# Altium PCB Booster_Channel_RF_HL.PcbDoc (part 1 of 3)
Units mm, origin at the board's own origin, x right, y up, seen from the top; angles counter-clockwise.
Board outline 159 x 28.5 mm, 2 copper layers (Top Layer, Bottom Layer), stack 1.063 mm thick; 161 components, 99 nets, 420 pads, 478 vias.
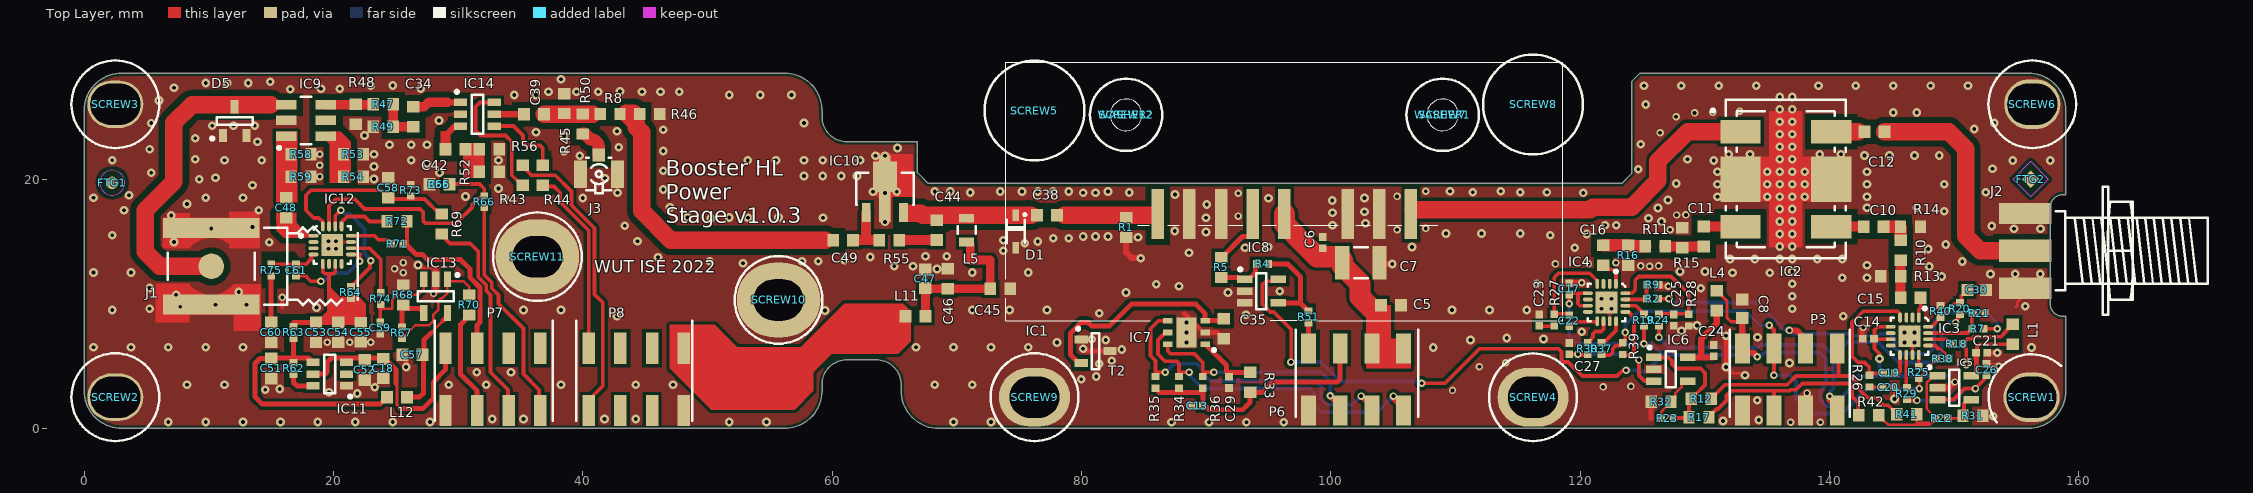
[diagram p0: Top Layer view]
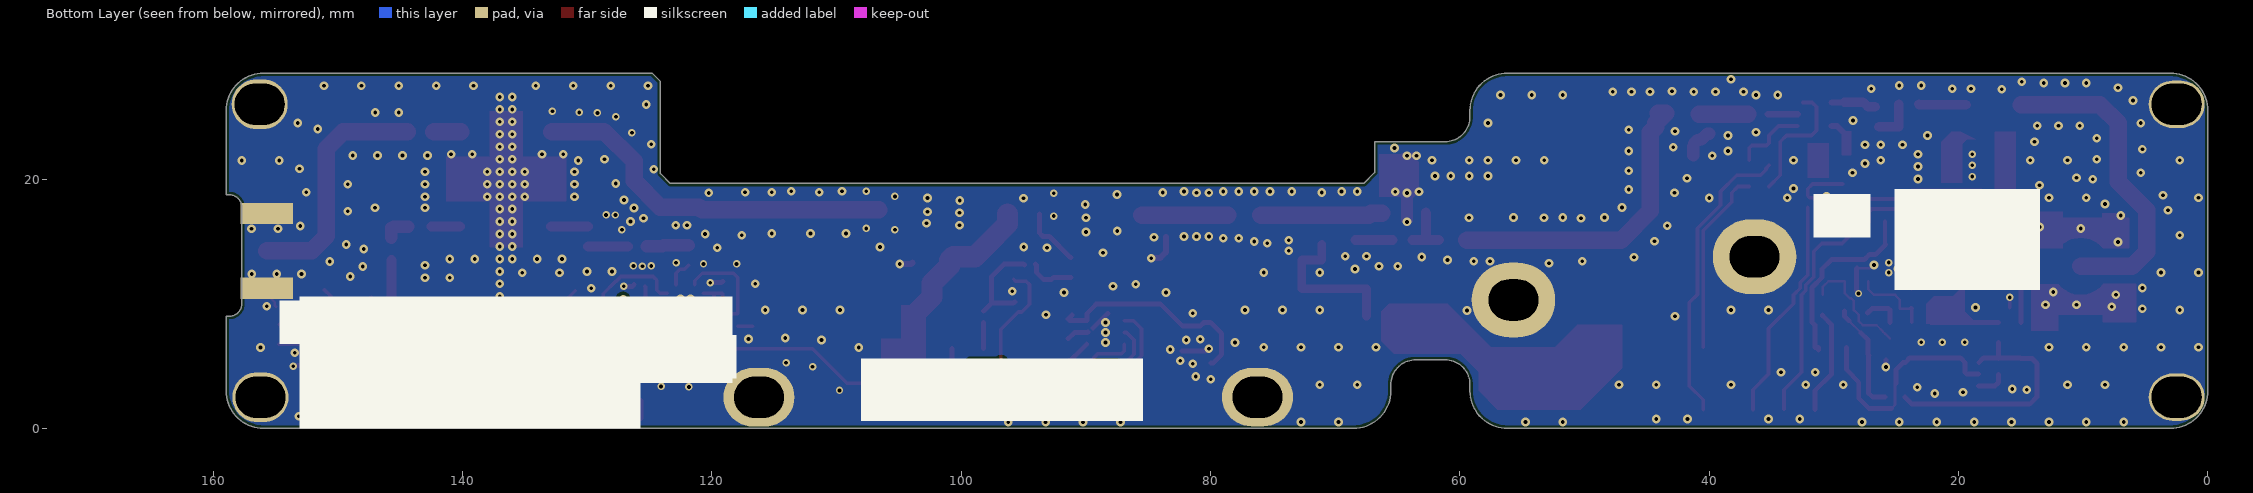
[diagram p1: Bottom Layer view, seen from below]
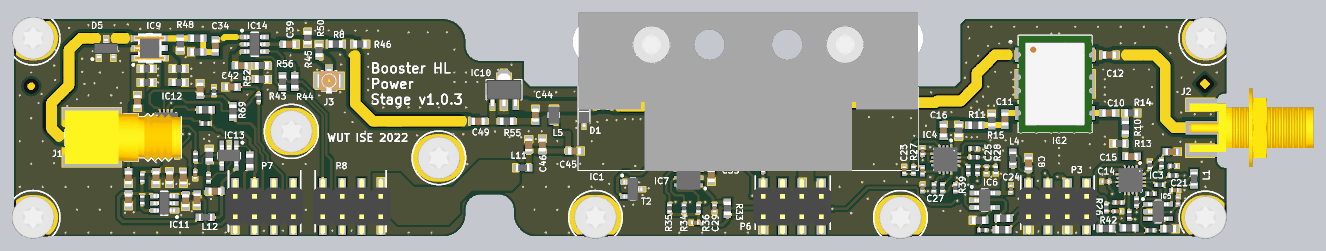
[diagram p3: 3D render of the assembled board from above, using the file's embedded part models]

## Layer stack, top to bottom
Top Layer: signal copper 0.036
Dielectric 1: core 0.9906, Core-042, Dk 4.6
Bottom Layer: signal copper 0.036

## Board outline
2.978,0 56.178,0 ccw(c56.178,3) 59.178,3 59.178,3.5 cw(c61.178,3.5) 61.178,5.5 63.528,5.5 cw(c63.528,3.5) 65.528,3.5 65.528,3 ccw(c68.528,3) 68.528,0 155.978,0 ccw(c155.978,3) 158.978,3 158.978,8.99 158.728,8.99 cw(c158.728,9.99) 157.728,9.99 157.728,17.74 cw(c158.728,17.74) 158.728,18.74 158.978,18.74 158.978,25.5 ccw(c155.978,25.5) 155.978,28.5 124.808,28.5 124.128,27.82 124.128,20.436 123.342,19.65 67.698,19.65 66.828,20.52 66.828,23 61.178,23 cw(c61.178,25) 59.178,25 59.178,25.5 ccw(c56.178,25.5) 56.178,28.5 2.978,28.5 ccw(c2.978,25.5) -0.022,25.5 -0.022,3 ccw(c2.978,3)

## Design rules (kind name [scope] priority, off if disabled: settings)
AcuteAngle [All] p1: minimum=6.00000000000000E+0001 checktracksonly=FALSE
BoardOutlineClearance [All] p1: gap=0.25 ignorepadtopadclearanceinfootprint=FALSE
Clearance Clearance_50_Ohm [InNetClass('50_Ohm') vs InNet('GND')] p1: gap=0.5 ignorepadtopadclearanceinfootprint=FALSE except(0.152: Arc-SMDPad Track-SMDPad SMDPad-SMDPad)
Clearance [All] p2: gap=0.152 ignorepadtopadclearanceinfootprint=FALSE except(0.279: Arc-Poly Track-Poly SMDPad-Poly THPad-Poly Via-Poly Fill-Fill Fill-Poly Fill-Region Fill-Text Fill-Hole Poly-Poly Poly-Region Poly-Text Poly-Hole Region-Region Region-Text Region-Hole)
ComponentClearance [All] p1: gap=0.1 collisioncheckmode=3 verticalgap=0.254 showdistances=FALSE
HoleSize [All] p1: absolutevalues=TRUE maxlimit=5.08 minlimit=0.127 maxpercent=80.000 minpercent=20.000
MinimumAnnularRing [All] p1: minimumring=0.1
MinimumSolderMaskSliver [All] p1: minsoldermaskwidth=0.1
PolygonConnect [All] p1: connectstyle=Direct reliefconductorwidth=0.254 reliefentries=4 polygonreliefangle="90 Angle" airgapwidth=0.254
RoomDefinition U_Booster_PA_OUT_HL [InComponentClass('U_Booster_PA_OUT_HL')] p1 off: confinementstyle=ConfineIn formatcopy=TRUE lockcomponents=FALSE outline 160.077,12.22 173.777,12.22 173.777,18.42 160.077,18.42
RoomDefinition Booster_Channel_RF_HL [InComponentClass('Booster_Channel_RF_HL')] p2 off: confinementstyle=ConfineIn formatcopy=TRUE lockcomponents=FALSE outline 160.077,1.52 181.277,1.52 181.277,12.62 160.077,12.62
RoomDefinition U_Booster_PA_PREAMP_HL [InComponentClass('U_Booster_PA_PREAMP_HL')] p3 off: confinementstyle=ConfineIn formatcopy=TRUE lockcomponents=FALSE outline 54.218,28.02 -2.757,28.02 -2.757,1.92 54.218,1.92
RoutingVias [All] p1: holewidth=0.711 width=1.27 viastyle="Through Hole" minholewidth=0.2 minwidth=0.4 maxholewidth=0.711 maxwidth=1.27
SilkToSilkClearance [All] p1: silktosilkclearance=0.2
SilkToSolderMaskClearance [IsPad] p1: minsilkscreentomaskgap=0.05 clearancetoexposedcopper=TRUE
SolderMaskExpansion [All] p1: expansion=0.1 istentingtop=FALSE
Width Width_50_Ohm [InNetClass('50_Ohm')] p1: maxlimit=1.4 minlimit=0.3 preferedwidth=1.4 bottomlayer_minwidth=1.4 impedanceprofiledriven=TRUE impedanceprofileid={EA730BA9-25A8-47F3-BE28-40912CDC90F2} impedanceprofilevalue=50.000000 minimp=50.000000 maximp=50.000000 favimp=50.000000
Width [All] p2: maxlimit=2 minlimit=0.2 preferedwidth=0.5 minimp=50.000000 maximp=50.000000 favimp=50.000000
25 further rules are at their usual default settings.

## Classes and differential pairs
component class Booster_Channel_RF_HL: FTG1 FTG2 SCREW1 SCREW2 SCREW3 SCREW4 SCREW5 SCREW6 SCREW7 SCREW8 SCREW9 SCREW10 SCREW11 SCREW12 WASHER1 WASHER2
component class U_Booster_PA_OUT_HL: C5 C6 C7 C8 C10 C11 C12 C13 C14 C15 C16 C17 C19 C20 C21 C22 C23 C24 C25 C26 C27 C29 C30 C35 C38 IC1 IC2 IC3 IC4 IC5 IC6 IC7 IC8 J2 L1 L4 P3 P6 R1 R2 R4 R5 R7 R9 R10 R11 R12 R13 R14 R15 R16 R17 R18 R19 R20 R21 R22 R23 R24 R25 R26 R27 R28 R29 R30 R31 R32 R33 R34 R35 R36 R37 R38 R39 R40 R41 R42 R51 T2
component class U_Booster_PA_PREAMP_HL: C18 C34 C39 C42 C44 C45 C46 C47 C48 C49 C51 C52 C53 C54 C55 C56 C57 C58 C59 C60 C61 D1 D5 IC9 IC10 IC11 IC12 IC13 IC14 J1 J3 L5 L11 L12 P7 P8 R8 R43 R44 R45 R46 R47 R48 R49 R50 R52 R53 R54 R55 R56 R58 R59 R62 R63 R64 R65 R66 R67 R68 R69 R70 R71 R72 R73 R74 R75
net class 50_Ohm: NetC10_1 NetC10_2 NetC11_1 NetC11_2 NetC12_1 NetC12_2 NetC15_2 NetC16_2 NetC34_1 NetC34_2 NetC38_1 NetC38_2 NetC39_1 NetC39_2 NetC42_1 NetC42_2 NetC48_1 NetC49_1 NetD5_3 NetIC9_4 NetIC9_6 NetJ3_1

## Components (designator, comment, footprint, x,y, rotation, side; value= is the part's Value field where it differs from the comment)
C5 "680pF" CAPC1608X87N 104.828,9.877 r180 top
C6 "100nF" CAPC1005X55N 99.364,14.906 r270 top
C7 "4.7uF" CAPC3225X270N 102.415,13.29 r180 top
C8 "4.7uF" CAPC1709X95N 133.028,9.59 r270 top
C10 "2.2nF" CAPC1608X87N 143.561,16.18 r180 top
C11 "2.2nF" CAPC1608X87N 129.928,15.39 r90 top
C12 "2.2nF" CAPC1608X87N 143.628,23.79 r180 top
C13 "100nF" CAPC1005X55N 89.276,1.803 r0 top
C14 "100nF" CAPC1005X55N 143.128,7.19 r0 top
C15 "2.2nF" CAPC1608X87N 146.528,10.49 r180 top
C16 "2.2nF" CAPC1608X87N 121.878,13.89 r90 top
C17 "100nF" CAPC1005X55N 119.128,11.19 r270 top
C18 "4.7uF" CAPC1709X95N 23.978,4.8 r90 top
C19 "1nF" CAPC1005X55N 144.828,4.44 r180 top
C20 "100nF" CAPC1005X55N 144.728,3.29 r0 top
C21 "100nF" CAPC1005X55N 152.219,6.06 r180 top
C22 "1nF" CAPC1005X55N 119.134,8.63 r90 top
C23 "100nF" CAPC1005X55N 116.728,8.69 r90 top
C24 "100nF" CAPC1005X55N 130.728,6.24 r270 top
C25 "100nF" CAPC1005X55N 127.528,8.69 r90 top
C26 "10nF" CAPC1005X55N 152.617,4.71 r270 top
C27 "10nF" CAPC1005X55N 119.128,6.39 r270 top
C29 "100nF" CAPC1005X55N 91.828,3.69 r90 top
C30 "Undefined" CAPC1608X90N 151.828,11.1 r180 top
C34 "680pF" CAPC1608X87N 26.378,25 r90 top
C35 "2.2nF" CAPC1608X87N 91.428,7.99 r90 top
C38 "3.3nF" CAPC1608X87N 77.228,17.085 r180 top
C39 "680pF" CAPC1608X87N 36.078,25.2 r0 top
C42 "680pF" CAPC1608X87N 29.778,22.4 r180 top
C44 "2.2nF" CAPC1608X87N 68.378,15.9 r90 top
C45 "680pF" CAPC1608X87N 73.478,11.2 r180 top
C46 "100nF" CAPC1608X87N 69.278,12 r270 top
C47 "4.7uF" CAPC1709X95N 67.478,12 r270 top
C48 "2.2nF" CAPC1608X87N 16.178,17.7 r90 top
C49 "680pF" CAPC1608X87N 60.878,15.1 r0 top
C51 "100nF" CAPC1608X87N 14.978,4.8 r270 top
C52 "100nF" CAPC1608X87N 22.478,4.69 r90 top
C53 "680pF" CAPC1608X87N 18.578,7.7 r90 top
C54 "100nF" CAPC1608X87N 20.378,7.7 r90 top
C55 "4.7uF" CAPC1709X95N 22.178,7.7 r90 top
C56 "47nF" CAPC1608X87N 28.478,19.6 r180 top
C57 "100nF" CAPC1608X87N 26.319,5.919 r0 top
C58 "100nF" CAPC1608X87N 24.378,19.3 r270 top
C59 "10nF" CAPC1005X55N 23.728,8.06 r90 top
C60 "100nF" CAPC1608X87N 14.978,7.7 r270 top
C61 "1nF" CAPC1005X55N 16.978,12.7 r90 top
D1 "AQ4021-01FTG-C" SOD2513X114N 74.728,15.789 r270 top
D5 "SZNUP1301ML3T1G" SOT95P240X110-3N 12.052,24.65 r90 top
FTG1 "Use only in PCB" FIDUCIAL_TOP_C100-200 2.228,19.7 r90 top
FTG2 "Use only in PCB" FIDUCIAL_TOP_S100-200 156.158,19.998 r90 top
IC1 "RFPD3580" SOT-115J_reversed 75.954,23.789 r0 top locked
IC2 "SYDC-20-62HP+" MINI-CIRCUITS_AH202-1 136.51,19.998 r0 top
IC3 "ADL5904ACPZN-R7" QFN50P300X300X80-17N-S175 146.428,7.39 r270 top
IC4 "ADL5904ACPZN-R7" QFN50P300X300X80-17N-S175 122.128,10.09 r270 top
IC5 "MCP6291T-E/OT" SOT95P270X145-5N 150.028,3.26 r0 top
IC6 "MCP6291T-E/OT" SOT95P270X145-5N 127.278,4.74 r0 top
IC7 "MAX6642ATT94+T" SON95P300X300X80-7N-R160X240 88.428,7.69 r180 top
IC8 "MCP6291T-E/OT" SOT95P270X145-5N 94.434,11.007 r0 top
IC9 "TCD-9-1WX+" MINI-CIRCUITS_DB1627 17.778,24.7 r90 top
IC10 "PHA-1+" MINI-CIRCUITS_DF782 64.228,19.229 r0 top
IC11 "ADP3300ARTZ-3.3-RL7" SOT95P280X145-6N 19.678,4.348 r180 top
IC12 "ADL5904ACPZN-R7" QFN50P300X300X80-17N-S175 19.878,14.7 r0 top
IC13 "MCP6291T-E/OT" SOT95P270X145-5N 28.178,10.6 r270 top
IC14 "HMC544AE" SOT95P280X145-6N 31.528,25.2 r0 top
J1 "SMA" LINK_CONSMA002-SMD-G 10.178,13 r0 top
J2 "SMA" MOLEX_73251-2120 155.728,14.24 r180 top
J3 "U.FL" HIROSE_U.FL-R-SMT-1(10) 41.278,20.4 r180 top
L1 "1000R@100MHz" INDC1608X95N 154.732,7.55 r90 top
L4 "1000R@100MHz" INDC1608X95N 130.978,10.24 r90 top
L5 "1.2uH" IND_TDK_ADL2012 70.778,15.9 r90 top
L11 "1000R@100MHz" INDC1608X95N 66.678,9 r180 top
L12 "1000R@100MHz" INDC1608X95N 25.078,2.5 r180 top
P3 "ZL264-8DG" HDR2X4_SMD#1 136.828,3.92 r90 top value=-
P6 "ZL264-8DG" HDR2X4_SMD#1 102.028,3.92 r90 top value=-
P7 "ZL264-8DG" HDR2X4_SMD#2 32.778,3.92 r90 top value="should be fixed with thermal glue"
P8 "ZL264-8DG" HDR2X4_SMD#2 44.278,3.92 r90 top value="should be fixed with thermal glue"
R1 "Undefined" RESC1608X55N 83.574,16.126 r90 top
R2 "0" RESC1005X40N 125.828,10.39 r0 top
R4 "10k" RESC1005X40N 94.528,13.19 r180 top
R5 "Undefined" RESC1608X55N 91.194,12.907 r270 top
R7 "0" RESC1005X40N 151.928,7.99 r0 top
R8 "0" RESC1608X55N 42.178,25.219 r0 top
R9 "0" RESC1005X40N 125.839,11.52 r180 top
R10 "71R5" RESC1608X55N 145.728,14.29 r90 top
R11 "71R5" RESC1608X55N 126.028,14.59 r180 top
R12 "Undefined" RESC1608X55N 129.728,2.38 r0 top
R13 "46R4" RESC1608X55N 144.928,12.19 r0 top
R14 "96R5" RESC1608X55N 146.51,16.19 r180 top
R15 "96R5" RESC1608X55N 128.188,15.29 r270 top
R16 "46R4" RESC1608X55N 123.878,13.89 r90 top
R17 "100" RESC1608X55N 129.55,0.888 r0 top
R18 "10k" RESC1005X40N 150.228,6.79 r180 top
R19 "10k" RESC1005X40N 125.128,8.69 r270 top
R20 "0" RESC1005X40N 150.478,9.609 r90 top
R21 "0" RESC1005X40N 152.022,9.24 r180 top
R22 "10k" RESC1005X40N 149.028,0.79 r0 top
R23 "10k" RESC1005X40N 126.994,0.822 r180 top
R24 "0" RESC1005X40N 126.328,8.69 r90 top
R25 "0" RESC1005X40N 147.178,4.48 r90 top
R26 "3R9" RESC1005X40N 143.228,3.79 r270 top
R27 "3R9" RESC1005X40N 117.928,8.69 r270 top
R28 "10k" RESC1005X40N 128.728,8.69 r270 top
R29 "0" RESC1005X40N 146.228,2.79 r90 top
R30 "0" RESC1005X40N 120.628,6.39 r90 top
R31 "20k" RESC1608X55N 151.519,0.991 r180 top
R32 "20k" RESC1608X55N 126.508,2.128 r0 top
R33 "39" RESC1608X55N 93.528,3.69 r270 top
R34 "10k" RESC1005X40N 87.828,3.69 r90 top
R35 "10k" RESC1005X40N 85.928,3.69 r90 top
R36 "10k" RESC1005X40N 89.728,3.69 r90 top
R37 "0" RESC1005X40N 121.728,6.39 r90 top
R38 "0" RESC1005X40N 149.107,5.6 r0 top
R39 "0" RESC1005X40N 123.428,6.39 r270 top
R40 "0" RESC1005X40N 148.928,9.39 r90 top
R41 "100" RESC1608X55N 146.211,1.118 r0 top
R42 "Undefined" RESC1608X55N 143.163,1.042 r0 top
R43 "100" RESC1608X55N 35.178,20.3 r90 top
R44 "100" RESC1608X55N 36.778,20.3 r270 top
R45 "Undefined" RESC1608X55N 38.478,26.05 r270 top
R46 "Undefined" RESC1608X55N 45.353,25.219 r180 top
R47 "0" RESC1608X55N 23.978,26 r0 top
R48 "Undefined" RESC1608X55N 21.778,25.2 r270 top
R49 "Undefined" RESC1608X55N 23.978,24.2 r180 top
R50 "Undefined" RESC1608X55N 39.978,24.419 r90 top
R51 "10k" RESC1005X40N 98.218,8.948 r90 top
R52 "100" RESC1608X55N 32.478,20.6 r180 top
R53 "100" RESC1608X55N 21.578,22 r180 top
R54 "100" RESC1608X55N 21.578,20.2 r180 top
R55 "1k" RESC1608X55N 64.578,15.1 r0 top
R56 "100" RESC1608X55N 32.478,22.4 r0 top
R58 "169" RESC1608X55N 17.378,22 r180 top
R59 "169" RESC1608X55N 17.378,20.2 r180 top
R62 "10k" RESC1005X40N 16.778,4.8 r90 top
R63 "0" RESC1005X40N 16.778,7.7 r90 top
R64 "10k" RESC1005X40N 21.378,10.9 r90 top
R65 "0" RESC1608X55N 28.478,19.6 r180 top
R66 "0" RESC1005X40N 32.078,18.18 r90 top
R67 "10k" RESC1005X40N 25.478,7.666 r90 top
R68 "20k" RESC1608X55N 25.578,10.7 r270 top
R69 "0" RESC1608X55N 28.678,16.4 r270 top
R70 "100" RESC1608X55N 30.878,9.9 r270 top
R71 "0" RESC1005X40N 25.078,14.8 r180 top
R72 "Undefined" RESC1608X55N 25.078,16.6 r0 top
R73 "10k" RESC1005X40N 26.185,19.1 r90 top
R74 "0" RESC1005X40N 23.778,10.4 r90 top
R75 "0" RESC1005X40N 14.978,12.7 r90 top
SCREW1 "M3x6" BOSSARD_BN5687-3061605_v 156.228,2.49 r0 top locked
SCREW2 "M3x6" BOSSARD_BN5687-3061605_v 2.478,2.5 r0 top locked
SCREW3 "M3x6" BOSSARD_BN5687-3061605_v 2.478,26 r0 top locked
SCREW4 "M3x6" BOSSARD_BN5687-3061605_v 116.228,2.49 r0 top locked
SCREW5 "M3x12" BOSSARD_B3X12/BN4851_v 76.225,25.5 r0 top
SCREW6 "M3x6" BOSSARD_BN5687-3061605_v 156.288,26 r0 top locked
SCREW7 "M2.5x16" BOSSARD_BN5687-3061603_v 108.974,25.149 r90 top
SCREW8 "M3x12" BOSSARD_B3X12/BN4851_v 116.225,25.986 r0 top
SCREW9 "M3x6" BOSSARD_BN5687-3061605_v 76.228,2.5 r0 top locked
SCREW10 "M3x6" BOSSARD_BN5687-3061605_v 55.688,10.3 r0 top locked
SCREW11 "M3x6" BOSSARD_BN5687-3061605_v 36.348,13.77 r0 top locked
SCREW12 "M2.5x16" BOSSARD_BN5687-3061603_v 83.574,25.149 r90 top
T2 "MMBT3906LT1G" SOT95P240X110-3N 81.128,6.19 r0 top
WASHER1 "D5xd2.7" BOSSARD_BN678-8303525_v 108.974,25.149 r90 top
WASHER2 "D5xd2.7" BOSSARD_BN678-8303525_v 83.574,25.149 r90 top

## Footprints (in the part's own frame and the unit in brackets; to place one, negate y for a bottom-side part, rotate by r counter-clockwise, add the part's x,y. Pads: shape width x height; smd on the part's side, far side on the other; paste and mask are expansions set on the pad)
BOSSARD_B3X12/BN4851_v [mm] "M3 L=12mm Hexalobular Countersank Head Screw, Fully Threaded - Stainless Steel A2"
  silkscreen extent -4,-4 4,4, body extent -3,-3 3,3, height 6.7
BOSSARD_BN678-8303525_v [mm] "Waved Spring Washer for M2.5 Screw - Stainless Steel - A2 / 1.4310"
  silkscreen extent -2.9,-2.9 2.9,2.9, body extent -2.5,-2.5 2.5,2.5, height 15.6
BOSSARD_BN5687-3061603_v [mm] "M2.5 L=16mm Hexalobular Socket Pan Head Screw, Fully Threaded - Stainless Steel A2"
  silkscreen extent -2.9,-2.9 2.9,2.9, body extent -2.5,-2.5 2.5,2.5, height 17.6
BOSSARD_BN5687-3061605_v [mm] "M3 L=6mm Hexalobular Socket Pan Head Screw, Fully Threaded - Stainless Steel A2"
  silkscreen extent -3.45,-2.02 2.36,3.45, body extent -2.8,-2.8 2.8,2.8, height 2.4
CAPC1005X55N [mm] "Capacitor, Non-Polarized, Chip; 1.00mm L X 0.50mm W X 0.70mm H, IPC Medium Density"
  rect 0.62x0.62 smd: 1(-0.45,0) 2(0.45,0)
  body extent -0.52,-0.27 0.53,0.28, height 0.55
CAPC1608X87N [mm] "Chip Capacitor, Body 1.6x0.8mm IPC Medium Density"
  rect 0.95x1 smd: 1(-0.8,0) 2(0.8,0)
  body extent -0.87,-0.47 0.88,0.48, height 0.87
CAPC1608X90N [mm] "Chip Capacitor, Body 1.6x0.8mm IPC Medium Density"
  rect 0.95x0.95 smd: 1(-0.75,0) 2(0.75,0)
  body extent -0.85,-0.45 0.85,0.45, height 0.9
CAPC1709X95N [mm] "Capacitor, non-Polarized, Chip; 1.65mm L X 0.85mm W X 0.95mm H,IPC Medium Density"
  rect 0.95x1 smd: 1(-0.75,0) 2(0.75,0)
  body extent -0.87,-0.47 0.88,0.48, height 0.95
CAPC3225X270N [mm] "Chip Capacitor, Body 3.2x2.5mm, IPC Medium Density"
  rect 1.15x2.7 smd: 1(-1.5,0) 2(1.5,0)
  silkscreen extent -0.55,-1.25 0.55,1.25, body extent -1.7,-1.35 1.7,1.35, height 2.7
FIDUCIAL_TOP_C100-200 [mm] "Round Fiducial Target, Top Layer, 1.0mm, Top Solder 2.0mm, Keepout =2.0mm"
  round 1 smd paste-0.51 mask+0.5: FTG2(0,0)
  Top Layer keep-out circle w0.1: c0,0 r1
FIDUCIAL_TOP_S100-200 [mm] "Square Fiducial Target, Top Layer, 1.0mm, Top Solder 2.0mm, Keepout =2.0mm"
  rect 1x1 smd rot 45 paste-0.51 mask+0.5: 1(0,0)
  Top Layer keep-out region: 1.414,0 0,-1.414 -1.414,0 0,1.414
HDR2X4_SMD#1 [mm]
  rect 2.4x1.2 smd: 1(-2.5,-3.81) 2(2.5,-3.81) 3(-2.5,-1.27) 4(2.5,-1.27) 5(-2.5,1.27) 6(2.5,1.27) 7(-2.5,3.81) 8(2.5,3.81)
  silkscreen extent -3,-4.79 4,4.83, body extent -3.65,-5.08 3.65,5.08, height 9.3
HDR2X4_SMD#2 [mm]
  rect 2.5x1 smd: 1(-2.5,-3.81) 2(2.5,-3.81) 3(-2.5,-1.27) 4(2.5,-1.27) 5(-2.5,1.27) 6(2.5,1.27) 7(-2.5,3.81) 8(2.5,3.81)
  silkscreen extent -3.3,-4.79 4.7,4.68, body extent -3.65,-5.08 3.65,5.08, height 9.3
HIROSE_U.FL-R-SMT-1(10) [mm] "Up to 6GHz Ultra Small Surface Mount Male Coaxial Connectors U.FL Series"
  rect 1x1.05 smd: 1(0,-1.525)
  rect 1.05x2.2 smd: 2(-1.475,0) 2(1.475,0)
  silkscreen extent -1,-1.3 1,1.55, body extent -1.5,-1.55 1.5,1.55, height 1.25
IND_TDK_ADL2012 [mm] "Chip Inductor, EIA 0805, Metric 2012, Body 2.0x1.25mm"
  rect 0.7x1.2 smd: 1(-0.95,0) 2(0.95,0)
  silkscreen extent -0.3,-0.72 0.3,0.72, body extent -1.1,-0.72 1.1,0.73, height 1.4
INDC1608X95N [mm] "Chip Inductor, 2-Leads, EIA 0603, Metric 1608, Body 1.6x0.8mm, IPC Medium Density"
  rect 0.95x1 smd: 1(-0.8,0) 2(0.8,0)
  body extent -0.87,-0.47 0.88,0.48, height 0.95
LINK_CONSMA002-SMD-G [mm] "SSMA Female Right Angled - Surface Mount"
  round 2.05 smd: 1(0,0)
  rect 7.76x1.6 smd: 2(0,-3.08) 2(0,3.08)
  Top Layer region: -3.88,1.44 -3.88,3.88 3.88,3.88 3.88,1.44 1.768,1.44 0.979,2.059 0,2.28 -0.979,2.059 -1.768,1.44 -1.768,1.44
  Top Layer region: 3.88,-1.44 3.88,-3.88 -3.88,-3.88 -3.88,-1.44 -1.768,-1.44 -0.979,-2.059 0,-2.28 0.979,-2.059 1.768,-1.44 1.768,-1.44
  silkscreen extent -3.5,-3.12 11.75,3.19, body extent -3.5,-3.5 11.7,3.5, height 10.8
MINI-CIRCUITS_AH202-1 [mm] "MINI-CIRCUITS AH202-1 Case, Body 12.7mm L X 9.65mm W X 6.35mm H"
  rect 3.23x1.88 smd: 1(3.643,3.81) 4(3.643,-3.81) 5(-3.643,-3.81) 8(-3.643,3.81)
  rect 3.23x2 smd: 2(3.643,0.83) 3(3.643,-0.83) 6(-3.643,-0.83) 7(-3.643,0.83)
  Top Layer region: -1.335,1.78 -4.825,1.78 -4.825,-1.78 -1.335,-1.78 -1.335,-5.46 1.335,-5.46 1.335,-1.78 4.825,-1.78 4.825,1.78 1.335,1.78 1.335,5.46 -1.335,5.46
  silkscreen extent -5.97,-6.35 4.82,6.35, body extent -4.82,-6.35 4.83,6.35, height 6.35
MINI-CIRCUITS_DB1627 [mm] "MINI-CIRCUITS Case Style DB1627 - Body 4.06X3.81mm"
  rect 0.76x1.65 smd: 1(-1.27,1.59) 2(0,1.59) 3(1.27,1.59) 4(1.27,-1.59) 5(0,-1.59) 6(-1.27,-1.59)
  silkscreen extent -2.32,-0.42 1.91,2.29, body extent -1.9,-2.03 1.91,2.03, height 4.06
MINI-CIRCUITS_DF782 [mm] "MINI-CIRCUITS DF782 Case, 1.50mm pitch; 4 pin, 2.44mm W X 4.49mm L"
  rect 0.71x1.5 smd: 1(-1.5,-1.915) 3(1.5,-1.915)
  rect 0.917x2.41 smd: 2(0,-1.46)
  rect 1.905x2.427 smd: 4(0,0.958)
  rect 0.92x0.493 smd: 4(0,2.418)
  Top Layer region: -0.457,-0.751 -0.953,-0.255 -0.953,2.172 -0.46,2.665 0.46,2.665 0.953,2.172 0.953,-0.255 0.457,-0.751 0.457,-2.665 -0.457,-2.665
  silkscreen extent -2.3,-1.3 2.3,1.3, body extent -2.3,-2.12 2.3,2.12, height 1.6
MOLEX_73251-2120 [mm] "50 Ohm, SMA Edge Mount PCB, With Jam Nut And Lock Washer"
  rect 4.19x1.78 smd: 1(0,0)
  rect 4.19x1.7 smd: 2(0,3) 2(0,-3)
  rect 4.19x1.7 smd far side: 2(0,3) 2(0,-3)
  silkscreen extent -14.64,-5.13 -2.44,5.13, body extent -14.64,-5.13 1.62,5.13, height 5.76
QFN50P300X300X80-17N-S175 [mm] "QFN, 0.50mm Pitch, Square; 16 Pin, 3.00mm L X 3.00mm W X 0.80mm H Body (w/Thermal Tab 1.75 X 1.75mm),  IPC Medium Density"
  oval 0.8x0.3 smd: 1(-1.5,0.75) 2(-1.5,0.25) 3(-1.5,-0.25) 4(-1.5,-0.75) 9(1.5,-0.75) 10(1.5,-0.25) 11(1.5,0.25) 12(1.5,0.75)
  oval 0.3x0.8 smd: 5(-0.75,-1.5) 6(-0.25,-1.5) 7(0.25,-1.5) 8(0.75,-1.5) 13(0.75,1.5) 14(0.25,1.5) 15(-0.25,1.5) 16(-0.75,1.5)
  rect 1.75x1.75 smd: 17(0,0)
  silkscreen extent -2.35,-1.5 1.5,1.5, body extent -1.57,-1.57 1.58,1.58, height 0.8
RESC1005X40N [mm] "Chip Resistor, EIA 0402, Metric 1005, Body 1.0x0.5mm, IPC Medium Density"
  rect 0.58x0.62 smd: 1(-0.47,0) 2(0.47,0)
  body extent -0.52,-0.27 0.53,0.28, height 0.4
RESC1608X55N [mm] "Chip Resistor, EIA 0603, Metric 1608, Body 1.6x0.8mm, IPC Medium Density"
  rect 0.9x1 smd: 1(-0.8,0) 2(0.8,0)
  body extent -0.87,-0.47 0.88,0.48, height 0.55
SOD2513X114N [mm] "SOD-323 Diode; 1.75mm W X 1.30mm L X 1.14mm H Body, IPC Medium Density"
  rect 0.9x0.5 smd: 1(-1.3,0) 2(1.3,0)
  silkscreen extent -1.45,-0.72 0.95,0.82, body extent -1.4,-0.72 1.4,0.73, height 1.15
SON95P300X300X80-7N-R160X240 [mm] "SON, 0.95mm Pitch; 6 Pin, 3.00mm W X 3mm L X 0.80mm H body (w/Thermal Tab 1.6mm x 2.4mm)"
  rect 0.75x0.45 smd: 1(-1.5,0.95) 2(-1.5,0) 3(-1.5,-0.95) 4(1.5,-0.95) 5(1.5,0) 6(1.5,0.95)
  rect 1.6x2.4 smd: 7(0,0)
  silkscreen extent -2.33,1.29 -2.08,1.54, body extent -1.55,-1.55 1.55,1.55, height 0.8
SOT95P240X110-3N [mm] "SOT23 3-Leads, Pitch 0.95mm, Body 1.3x2.9mm, IPC Medium Density"
  rect 1.05x0.65 smd: 1(-1.15,0.95) 2(-1.15,-0.95) 3(1.15,0)
  silkscreen extent -1.52,-1.45 0.3,1.92, body extent -1.25,-1.5 1.25,1.5, height 1.1
SOT95P270X145-5N [mm] "SOT, 0.95mm Pitch; 5 Pin,1.55mm W X 2.90mm L X 1.45mm H body, IPC Medium Density"
  rect 1.25x0.6 smd: 1(-1.35,0.95) 2(-1.35,0) 3(-1.35,-0.95) 4(1.35,-0.95) 5(1.35,0.95)
  silkscreen extent -2.12,-1.45 0.4,1.77, body extent -1.35,-1.45 1.35,1.45, height 1.45
SOT95P280X145-6N [mm] "SOT23, 6-Leads, Body 1.6x3.0mm, Pitch 0.95mm, IPC Medium Density"
  rect 1.05x0.6 smd: 1(-1.35,0.95) 2(-1.35,0) 3(-1.35,-0.95) 4(1.35,-0.95) 5(1.35,0) 6(1.35,0.95)
  silkscreen extent -1.78,-1.55 0.45,1.92, body extent -1.4,-1.5 1.4,1.5, height 1.45
SOT-115J_reversed [mm] "SOT-115J 2.54 Hybrid module"
  rect 1x4 smd: 1(10.16,-6.604) 2(12.7,-6.604) 3(15.24,-6.604) 4(17.78,-6.604) 5(20.32,-6.604) 7(25.4,-6.604) 8(27.94,-6.604) 9(30.48,-6.604)
  silkscreen extent -2.03,-15.14 42.67,5.59, body extent -1.93,-15.24 42.57,5.56, height 17.4

## Part data
C5 C34 C39 C42 C45 C49 C53: library part CC0603_680PF_50V_5%_NP0, "Non-polarised capacitor", Case=0603, Manufacturer=GENERIC, Manufacturer1 ComponentHeight=0.87mm, Manufacturer1 Example=PHYCOMP, Manufacturer1 Part Number=223886715681, Tolerance=±5%, Voltage=50V, Author="CERN DEM JLC", Component Type=Standard, CreateDate=03.12.2007, HelpURL=\\cern.ch\dfs\Applications\Altium\Datasheets\CC0603_NP0_PHYCOMP.pdf, LatestRevisionDate=03.12.2007, Manufacturer Part Number=CC0603_680PF_50V_5%_NP0, Mounted=Yes, Part Description="SMD Multilayer Chip Ceramic Capacitor", Part Number=CC0603_680PF_50V_5%_NP0, Pin Count=2, Sense=No, SMD=Yes, Socket=No, Status=Preferred, TC=C0G/NP0
C6 C13 C14 C17 C20 C21 C23 C24 C25 C29: library part CC0402_100NF_50V_10%_X7R, "Non-polarised capacitor", Case=0402, Manufacturer=GENERIC, Manufacturer1 ComponentHeight=0.55mm, Manufacturer1 Example=MURATA, Manufacturer1 Part Number=GRM155R71H104KE14D, Tolerance=±10%, Voltage=50V, Author="CERN DEM MR", Component Type=Standard, CreateDate=30/06/2017, HelpURL=\\cern.ch\dfs\Applications\Altium\Datasheets\CC0402_MURATA_GRM155R71H104KE14D.pdf, LatestRevisionDate=30/06/2017, Manufacturer Part Number=CC0402_100NF_50V_10%_X7R, Mounted=Yes, Part Description="SMD Multilayer Chip Ceramic Capacitor", Part Number=CC0402_100NF_50V_10%_X7R, Pin Count=2, Sense=No, SMD=Yes, Socket=No, Status=None, TC=X7R
C7: library part CC1210_4.7UF_50V_10%_X7R, "Non-polarised capacitor", Case=1210, Manufacturer=GENERIC, Manufacturer1 ComponentHeight=2.7mm, Manufacturer1 Example=KEMET, Manufacturer1 Part Number=C1210C475K5RAC, Tolerance=±10%, Voltage=50V, Author="CERN DEM JLC", Component Type=Standard, CreateDate=01.04.2009, HelpURL=\\cern.ch\dfs\Applications\Altium\Datasheets\CC1210_X7R_KEMET.pdf, LatestRevisionDate=05.05.2009, Manufacturer Part Number=CC1210_4.7UF_50V_10%_X7R, Mounted=Yes, Part Description="SMD Multilayer Chip Ceramic Capacitor", Part Number=CC1210_4.7UF_50V_10%_X7R, Pin Count=2, Sense=No, SMD=Yes, Socket=No, Status=None, TC=X7R
C8 C18 C47 C55: library part CC0603_4.7UF_16V_10%_X5R, "Non-polarised capacitor", Case=0603, Manufacturer=GENERIC, Manufacturer1 ComponentHeight=0.95mm, Manufacturer1 Example="TAIYO YUDEN", Manufacturer1 Part Number=EMK107ABJ475KA-T, Tolerance=±10%, Voltage=16V, Author="CERN DEM JLC", Component Type=Standard, CreateDate=16.12.2013, HelpURL=\\cern.ch\dfs\Applications\Altium\Datasheets\CC0603_X7R_TAIYO-YUDEN_HIGH-VALUE.pdf, LatestRevisionDate=16.09.2014, Manufacturer Part Number=CC0603_4.7UF_16V_10%_X5R, Mounted=Yes, Part Description="SMD Multilayer Chip Ceramic Capacitor", Part Number=CC0603_4.7UF_16V_10%_X5R, Pin Count=2, Sense=No, SMD=Yes, Socket=No, Status=None, TC=X5R
C10 C11 C12 C15 C16 C35 C44 C48: library part CC0603_2.2NF_50V_5%_C0G, "Non-polarised capacitor", Case=0603, Manufacturer=GENERIC, Manufacturer1 ComponentHeight=0.9mm, Manufacturer1 Example=TDK, Manufacturer1 Part Number=C1608C0G1H222J080AA, Tolerance=±5%, Voltage=50V, Author="CERN DEM JMW", Component Type=Standard, CreateDate=23.06.2014, HelpURL=\\cern.ch\dfs\Applications\Altium\Datasheets\CC0603_C0G_TDK_C.pdf, LatestRevisionDate=23.06.2014, Manufacturer Part Number=CC0603_2.2NF_50V_5%_C0G, Mounted=Yes, Part Description="SMD Multilayer Chip Ceramic Capacitor", Part Number=CC0603_2.2NF_50V_5%_C0G, Pin Count=2, Sense=No, SMD=Yes, Socket=No, Status=Preferred, TC=C0G/NP0
C19 C22 C61: library part CC0402_1NF_50V_10%_X7R, "Non-polarised capacitor", Case=0402, Manufacturer=GENERIC, Manufacturer1 ComponentHeight=0.55mm, Manufacturer1 Example=PHYCOMP, Manufacturer1 Part Number=223858715623, Tolerance=±10%, Voltage=50V, Author="CERN DEM JLC", Component Type=Standard, CreateDate=03.12.2007, HelpURL=\\cern.ch\dfs\Applications\Altium\Datasheets\CC0402_X7R_PHYCOMP.pdf, LatestRevisionDate=03.12.2007, Manufacturer Part Number=CC0402_1NF_50V_10%_X7R, Mounted=Yes, Part Description="SMD Multilayer Chip Ceramic Capacitor", Part Number=CC0402_1NF_50V_10%_X7R, Pin Count=2, Sense=No, SMD=Yes, Socket=No, Status="Not Recommended", TC=X7R
C26 C27 C59: library part CC0402_10NF_25V_10%_X7R, "Non-polarised capacitor", Case=0402, Manufacturer=GENERIC, Manufacturer1 ComponentHeight=0.55mm, Manufacturer1 Example=TDK, Manufacturer1 Part Number=C1005X7R1E103KT, Tolerance=±10%, Voltage=25V, Author="CERN DEM JLC", Component Type=Standard, CreateDate=25.10.2012, HelpURL=\\cern.ch\dfs\Applications\Altium\Datasheets\CC0402_X7R_TDK_C.pdf, LatestRevisionDate=25.10.2012, Manufacturer Part Number=CC0402_10NF_25V_10%_X7R, Mounted=Yes, Part Description="SMD Multilayer Chip Ceramic Capacitor", Part Number=CC0402_10NF_25V_10%_X7R, Pin Count=2, Sense=No, SMD=Yes, Socket=No, Status=Preferred, TC=X7R
C30: library part CC0603_NO-VALUE, "Non-polarised capacitor", Case=0603, Manufacturer1 ComponentHeight=0.9mm, Author="CERN DEM MR", Component Type=Standard, CreateDate=22.11.2016, HelpURL=Undefined, LatestRevisionDate=22.11.2016, Manufacturer=Undefined, Manufacturer Part Number=CC0603_NO-VALUE, Mounted=No, Part Description="Reserved Footprint For 0603(1608) Chip Ceramic Capacitor", Part Number=CC0603_NO-VALUE, Pin Count=2, Sense=No, SMD=Yes, Socket=No, Status=None
C38: library part CC0603_3.3NF_50V_5%_C0G, "Non-polarised capacitor", Case=0603, Manufacturer=GENERIC, Manufacturer1 ComponentHeight=0.9mm, Manufacturer1 Example=TDK, Manufacturer1 Part Number=C1608C0G1H332J080AA, Tolerance=±5%, Voltage=50V, Author="CERN DEM MR", Component Type=Standard, CreateDate=02.11.2016, HelpURL=\\cern.ch\dfs\Applications\Altium\Datasheets\CC0603_C0G_TDK_C.pdf, LatestRevisionDate=02.11.2016, Manufacturer Part Number=CC0603_3.3NF_50V_5%_C0G, Mounted=Yes, Part Description="SMD Multilayer Chip Ceramic Capacitor", Part Number=CC0603_3.3NF_50V_5%_C0G, Pin Count=2, Sense=No, SMD=Yes, Socket=No, Status=Preferred, TC=C0G/NP0
C46 C51 C52 C54 C57 C58 C60: library part CC0603_100NF_50V_10%_X7R, "Non-polarised capacitor", Case=0603, Manufacturer=GENERIC, Manufacturer1 ComponentHeight=0.87mm, Manufacturer1 Example=PHYCOMP, Manufacturer1 Part Number=223858615649, Tolerance=±10%, Voltage=50V, Author="CERN DEM JLC", Component Type=Standard, CreateDate=03.12.2007, HelpURL=\\cern.ch\dfs\Applications\Altium\Datasheets\CC0603_X7R_PHYCOMP.pdf, LatestRevisionDate=03.12.2007, Manufacturer Part Number=CC0603_100NF_50V_10%_X7R, Mounted=Yes, Part Description="SMD Multilayer Chip Ceramic Capacitor", Part Number=CC0603_100NF_50V_10%_X7R, Pin Count=2, Sense=No, SMD=Yes, Socket=No, Status=Preferred, TC=X7R
C56: library part CC0603_47NF_25V_10%_X7R, "Non-polarised capacitor", Case=0603, Manufacturer=GENERIC, Manufacturer1 ComponentHeight=0.87mm, Manufacturer1 Example=PHYCOMP, Manufacturer1 Part Number=223891615645, Tolerance=±10%, Voltage=25V, Author="CERN DEM JLC", Component Type=Standard, CreateDate=03/12/2007, HelpURL=\\cern.ch\dfs\Applications\Altium\Datasheets\CC0603_X7R_PHYCOMP.pdf, LatestRevisionDate=03/12/2007, Manufacturer Part Number=CC0603_47NF_25V_10%_X7R, Mounted=Yes, Part Description="SMD Multilayer Chip Ceramic Capacitor", Part Number=CC0603_47NF_25V_10%_X7R, Pin Count=2, Sense=No, SMD=Yes, Socket=No, Status=Preferred, TC=X7R
D1: library part D_TVS_AQ4021-01FTG-C, "6V Bi-directional,ESD Protection for Transient Voltage Suppressor Diode", Case=SOD323, Manufacturer=Littlefuse, Power=450W, Voltage=6V, Author=GK, Bonding=No, Component Type=Standard, ComponentHeight=1.14mm, CreateDate=22.07.2015, Device=AQ4021-01FTG-C, HelpURL=\\cern.ch\dfs\Applications\Altium\Datasheets\CDSOD323-T12C-DSL.pdf, LatestRevisionDate=19.12.2017, Manufacturer Part Number=AQ4021-01FTG-C, Mounted=Yes, PackageDescription="SOD-323 Diode; 1.75mm W X 1.30mm L X 1.14mm H Body, IPC Medium Density", Part Description="Bi-directional ESD Protection for Transient Voltage Suppressor Diode", Part Number=AQ4021-01FTG-C, Pin Count=2, PressFit=No, Sense=No, SMD=Yes, Socket=No
D5: library part D_TVS_SZNUP1301ML3T1G, "Low Capacitance Diode Array for ESD Protection in a Single Data Line", Case=SOT23, Manufacturer=ONSEMI, Power=215mA, Voltage=70V, Author=GK, Bonding=No, Component Type=Standard, ComponentHeight=1.1mm, CreateDate=18.01.2010, Device=SZNUP1301ML3T1G, HelpURL=\\cern.ch\dfs\Applications\Altium\Datasheets\BAR66.pdf, LatestRevisionDate=05.10.2010, Manufacturer Part Number=SZNUP1301ML3T1G, Mounted=Yes, PackageDescription="SOT23 3-Leads, Pitch 0.95mm - Body 1.3x2.9mm, IPC Medium Density", Part Description="Low Capacitance Diode Array for ESD Protection in a Single Data Line", Part Number=SZNUP1301ML3T1G, Pin Count=3, PressFit=No, Sense=No, SMD=Yes, Socket=No
FTG1: library part FIDUCIAL_TARGET_C100-200, "Fiducial Target", Author="CERN DEM JLC", Component Type="Standard (No BOM)", ComponentHeight=0mm, CreateDate=09.02.2010, Family=Fiducial, HelpURL=Undefined, LatestRevisionDate=04.04.2012, Mounted=No, PackageDescription="Round Fiducial Target, Top Layer, 1.0mm, Top Solder 2.0mm, Keepout =2.0mm", Part Description="Round Fiducial Target, Top Layer, 1.0mm, Top Solder 2.0mm, Keepout =2.0mm", Part Number=FIDUCIAL_TARGET_C100-200, Pin Count=1, Sense=No, SMD=Yes, Socket=No, Status=None
FTG2: library part FIDUCIAL_TARGET_S100-200, "Fiducial Target", Author="CERN DEM JLC", Component Type="Standard (No BOM)", ComponentHeight=0mm, CreateDate=09.02.2010, Family=Fiducial, HelpURL=Undefined, LatestRevisionDate=04.04.2012, Mounted=No, PackageDescription="Square Fiducial Target, Top Layer, 1.0mm, Top Solder 2.0mm, Keepout =2.0mm", Part Description="Square Fiducial Target, Top Layer, 1.0mm, Top Solder 2.0mm, Keepout =2.0mm", Part Number=FIDUCIAL_TARGET_S100-200, Pin Count=1, Sense=No, SMD=Yes, Socket=No, Status=None
IC1: library part RF_RFPD3580, "GaAs/GaN Power Doubler Hybrid / 45MHz to 1218MHz", Case=SOT-115J, Manufacturer=QORVO, Author="CERN DEM JLC", Bonding=No, Component Type=Standard, ComponentHeight=1.1mm, CreateDate=03.07.2017, Device=RFPD3580, HelpURL=\\cern.ch\dfs\Applications\Altium\Datasheets\AG203-63G.pdf, LatestRevisionDate=03.07.2017, Manufacturer Part Number=RFPD3580, Mounted=Yes, PackageDescription="SOT-115J 2.54 Hybrid module", Part Description="GaAs/GaN Power Doubler Hybrid", Part Number=RFPD3580, Pin Count=6, PressFit=No, Sense=No, SMD=Yes, Socket=No
IC2: "50Ohm, 10 to 540MHz, 25W, 20dB Bi-Directional Coupler", Manufacturer=MINI-CIRCUITS, Author="CERN DEM BC", Bonding=No, ComponentHeight=6.35mm, Component Type=Standard, CreateDate=26.08.2019, Device=SYDC-20-62HP+, HelpURL=\\cern.ch\dfs\Applications\Altium\Datasheets\SYDC-20-62HP+.pdf, LatestRevisionDate=26.08.2019, Manufacturer Part Number=SYDC-20-62HP+, Mounted=Yes, PackageDescription="MINI-CIRCUITS AH202-1 Case, Body 12.7mm L X 9.65mm W X 6.35mm H", Part Description="50Ohm, 10 to 540MHz, 25W, 20dB Bi-Directional Coupler", Part Number=SYDC-20-62HP+, Pin Count=8, PressFit=No, Sense=No, SMD=Yes, Socket=No
IC3 IC4 IC12: "DC to 6 GHz, 45 dB TruPwr Detector With Envelope Threshold Detection", Case=QFN16, Manufacturer="ANALOG DEVICES", Author="CERN DEM MR", Bonding=No, ComponentHeight=0.8mm, Component Type=Standard, CreateDate=26.09.2017, Device=ADL5904ACPZN-R7, HelpURL=\\cern.ch\dfs\Applications\Altium\Datasheets\ADL5904ACPZN-R7.pdf, LatestRevisionDate=26.09.2017, Manufacturer Part Number=ADL5904ACPZN-R7, Mounted=Yes, PackageDescription="QFN, 0.50mm Pitch, Square; 16 Pin, 3.00mm L X 3.00mm W X 0.80mm H Body (w/Thermal Tab 1.75 X 1.75mm),  IPC Medium Density", Part Description="DC to 6 GHz, 45 dB TruPwr Detector With Envelope Threshold Detection", Part Number=ADL5904ACPZN-R7, Pin Count=17, PressFit=No, Sense=No, SMD=Yes, Socket=No
IC5 IC6 IC8 IC13: "Operational Amplifier", Case=SOT23-5, Manufacturer="MICROCHIP TECHNOLOGY", Author="CERN DEM BC", Bonding=No, ComponentHeight=1.45mm, Component Type=Standard, CreateDate=22.08.2019, Device=MCP6291T-E/OT, HelpURL=\\cern.ch\dfs\Applications\Altium\Datasheets\MCP6291T-E-OT.pdf, LatestRevisionDate=22.08.2019, Manufacturer Part Number=MCP6291T-E/OT, Mounted=Yes, PackageDescription="SOT, 0.95mm pitch; 5 pin, 1.55mm W X 2.90mm L X 1.45mm H body, IPC Medium Density", Part Description="1.0mA, 10 MHz Rail-to-Rail Operational Amplifier", Part Number=MCP6291T-E/OT, Pin Count=5, PressFit=No, Sense=No, SMD=Yes, Socket=No
IC7: "±1°C, SMBus-Compatible Remote/Local Temperature Sensor with Overtemperature Alarm", Case=SON6, Manufacturer=MAXIM, Author="CERN DEM JLC", Bonding=No, ComponentHeight=0.8mm, Component Type=Standard, CreateDate=26.11.2013, Device=MAX6642ATT94+T, HelpURL=\\cern.ch\dfs\Applications\Altium\Datasheets\MAX6642ATT94+T.pdf, LatestRevisionDate=26.11.2013, Manufacturer Part Number=MAX6642ATT94+T, Mounted=Yes, PackageDescription="SON, 0.95mm Pitch; 6 Pin, 3.00mm W X 3mm L X 0.80mm H body (w/Thermal Tab 1.6mm x 2.4mm)", Part Description="0°C to +125°C, ±1°C, SMBus-Compatible Remote/Local Temperature Sensor with Overtemperature Alarm (Address 1001 010)", Part Number=MAX6642ATT94+T, Pin Count=7, PressFit=No, Sense=No, SMD=Yes, Socket=No
IC9: "50 Ohm, 5 To 2000MHz, Directional Coupler", Manufacturer=MINI-CIRCUITS, Author="CERN DEM BC", Bonding=No, ComponentHeight=4.06mm, Component Type=Standard, CreateDate=22.08.2019, Device=TCD-9-1WX+, HelpURL=\\cern.ch\dfs\Applications\Altium\Datasheets\TCD-9-1WX+.pdf, LatestRevisionDate=22.08.2019, Manufacturer Part Number=TCD-9-1WX+, Mounted=Yes, PackageDescription="MINI-CIRCUITS Case Style DB1627 - Body 4.06X3.81mm", Part Description="50 Ohms, 5 To 2000MHz, Directional Coupler", Part Number=TCD-9-1WX+, Pin Count=6, PressFit=No, Sense=No, SMD=Yes, Socket=No
IC10: "Monolithic Amplifier", Manufacturer=MINI-CIRCUITS, Author="CERN DEM BC", Bonding=No, ComponentHeight=1.6mm, Component Type=Standard, CreateDate=22.08.2019, Device=PHA-1+, HelpURL=\\cern.ch\dfs\Applications\Altium\Datasheets\PHA-1+.pdf, LatestRevisionDate=22.08.2019, Manufacturer Part Number=PHA-1+, Mounted=Yes, PackageDescription="MINI-CIRCUITS DF782 Case, 1.50mm pitch; 4 pin, 2.44mm W X 4.49mm L", Part Description="0.05-6GHz Surface Mount Monolithic Amplifier", Part Number=PHA-1+, Pin Count=4, PressFit=No, Sense=No, SMD=Yes, Socket=No
IC11: "High Accuracy anyCAP® 50 mA Low Dropout Linear Regulator", Case=SOT23-6, Manufacturer="ANALOG DEVICES", Author="CERN DEM JLC", Bonding=No, ComponentHeight=1.45mm, Component Type=Standard, CreateDate=30.11.2011, Device=ADP3300ARTZ-3.3-RL7, HelpURL=\\cern.ch\dfs\Applications\Altium\Datasheets\ADP3300ARTZ-3.3-RL7.pdf, LatestRevisionDate=30.11.2011, Manufacturer Part Number=ADP3300ARTZ-3.3-RL7, Mounted=Yes, PackageDescription="SOT23, 0.95mm pitch; 6 pin, 1.6mm W X 2.9mm L X 1.45mm H body, IPC Medium Density", Part Description="3.3V High Accuracy anyCAP® 50 Ma Low Dropout Linear Regulator", Part Number=ADP3300ARTZ-3.3-RL7, Pin Count=6, PressFit=No, Sense=No, SMD=Yes, Socket=No
IC14: "GaAs MMIC T/R Switch DC - 4 GHz", Case=SOT23-6, Manufacturer="ANALOG DEVICES", Author="CERN DEM MR", Bonding=No, Component Type=Standard, ComponentHeight=1.45mm, CreateDate=26.09.2017, Device=HMC544AE, HelpURL=\\cern.ch\dfs\Applications\Altium\Datasheets\HMC544AE.pdf, LatestRevisionDate=26.09.2017, Manufacturer Part Number=HMC544AE, Mounted=Yes, PackageDescription="SOT23, 6-Leads, Body 1.6x3.0mm, Pitch 0.95mm, IPC Medium Density", Part Description="GaAs MMIC T/R Switch DC - 4 GHz", Part Number=HMC544AE, Pin Count=6, PressFit=No, Sense=No, SMD=Yes, Socket=No
J1: library part LINK_CONSMA002-SMD-G, Manufacturer="LINK TECHNOLOGIES", Manufacturer Part Number=CONSMA002-SMD-G, Author="CERN DEM BC", ComponentHeight=10.8mm, Component Type=Standard, CreateDate=28.08.2019, Family=SMA, HelpURL=\\cern.ch\dfs\Applications\Altium\Datasheets\LINK_CONSMA002-SMD-G.pdf, LatestRevisionDate=28.08.2019, Mounted=Yes, Part Description="SMA Female Right Angled - Surface Mount", Part Number=LINK_CONSMA002-SMD-G, Pin Count=2, PressFit=No, Sense=No, SMD=Yes, Socket=No, Status=None
J2: library part CON_SMA_RA_SMD_73251-2120, "50 Ohm, SMA Edge Mount PCB, With Jam Nut And Lock Washer", Manufacturer=MOLEX, Manufacturer Part Number=73251-2120, Part Number=MOLEX_73251-2120, Author="CERN DEM JLC", ComponentHeight=5.75mm, Component Type=Standard, CreateDate=26.10.2016, Family=SMA, HelpURL=\\cern.ch\dfs\Applications\Altium\Datasheets\MOLEX_73251-2121.pdf, LatestRevisionDate=26.10.2016, Mounted=Yes, Part Description="50 Ohm, SMA Edge Mount PCB, With Jam Nut And Lock Washer", Pin Count=5, PressFit=No, Sense=No, SMD=Yes, Socket=No, Status=None
J3: library part HIROSE_U.FL-R-SMT-1(10), Manufacturer="HIROSE (HRS)", Manufacturer Part Number=U.FL-R-SMT-1(10), Author="CERN DEM JLC", ComponentHeight=1.25mm, Component Type=Standard, CreateDate=24.03.2010, Family=U.FL, HelpURL=\\cern.ch\dfs\Applications\Altium\Datasheets\HIROSE_U.FL-R-SMT-1(10).pdf, LatestRevisionDate=24.03.2010, Mounted=Yes, Part Description="Up to 6GHz Ultra Small Surface Mount Male Coaxial Connectors U.FL Series", Part Number=HIROSE_U.FL-R-SMT-1(10), Pin Count=2, PressFit=No, Sense=No, SMD=Yes, Socket=No, Status=None
L1 L4 L11 L12: library part IND0603_MURATA_BLM18HE102SN1, Case=0603, Manufacturer=MURATA, Manufacturer Part Number=BLM18HE102SN1, Power=600mA, Resistance=0.35R, Tolerance=±25%, Author="CERN DEM JLC", ComponentHeight=0.95mm, Component Type=Standard, CreateDate=09.12.2013, HelpURL=\\cern.ch\dfs\Applications\Altium\Datasheets\IND0603_MURATA_BLM18H.pdf, LatestRevisionDate=25.10.2018, Mounted=Yes, Part Description="SMD EMIFIL Suppression Chip Ferrite Bead", Part Number=IND0603_MURATA_BLM18HE102SN1, Pin Count=2, Sense=No, SMD=Yes, Socket=No, Status=None
L5: library part IND0805_TDK_ADL2012S-1R2M-T01, "Inductor", Case=0805, Manufacturer=TDK, Manufacturer Part Number=ADL2012S-1R2M-T01, Power=400mA, Resistance=0.5Ohm, Tolerance=±20%, Author=GK, Component Type=Standard, ComponentHeight=1.45mm, CreateDate=24.03.2020, HelpURL=\\cern.ch\dfs\Applications\Altium\Datasheets\IND0805_TDK_MLZ2012P220WT000.pdf, LatestRevisionDate=24.03.2020, Mounted=Yes, Part Description="SMD Wirewound", Part Number=IND0805_TDK_ADL2012S-1R2M-T01, Pin Count=2, Sense=No, SMD=Yes, Socket=No
P3 P6 P7 P8: library part HDR2X4, "Header, 4-Pin, Dual Row", Manufacturer=-, Package="2x4 pin SMD", Generic=yes, Manufacturer Part Number=ZL264-8DG, Mounting type=SMT, Remarks="ordinary goldpin socket", Supplier 1=TME, Supplier 2=-, Supplier 3=-, Supplier Part Number 1=ZL264-8DG, Supplier Part Number 2=-, Supplier Part Number 3=-
R1 R5 R12 R42 R45 R46 R48 R49 R50 R72: library part R0603_NO-VALUE, "Resistor", Case=0603, Author="CERN DEM JLC", Component Type=Standard, CreateDate=03.12.2007, HelpURL=Undefined, LatestRevisionDate=13.03.2008, Manufacturer=Undefined, Manufacturer1 ComponentHeight=Undefined, Manufacturer1 Example=Undefined, Manufacturer1 Part Number=Undefined, Manufacturer Part Number=R0603_NO-VALUE, Mounted=No, Part Description="Reserved Footprint For a 0603 (1608) Chip Resistor", Part Number=R0603_NO-VALUE, Pin Count=2, PressFit=No, Sense=No, SMD=Yes, Socket=No, Status=None
R2 R7 R9 R20 R21 R24 R25 R29 R30 R37 R38 R39 R40 R63 R66 R71 R74 R75: library part R0402_0R_JUMPER, "Resistor", Case=0402, Manufacturer=GENERIC, Manufacturer1 ComponentHeight=0.4mm, Manufacturer1 Example="YAGEO PHYCOMP", Manufacturer1 Part Number=232270591001L, Author="CERN DEM JLC", Component Type=Standard, CreateDate=03.12.2007, HelpURL=\\cern.ch\dfs\Applications\Altium\Datasheets\R0402_Phycomp_RC0402.pdf, LatestRevisionDate=17.10.2012, Manufacturer Part Number=R0402_0R_JUMPER, Mounted=Yes, Part Description="1A (0.05R Max DC Resistance) Zero Ohm Jumper", Part Number=R0402_0R_JUMPER, Pin Count=2, PressFit=No, Sense=No, SMD=Yes, Socket=No, Status="Not Recommended"
R4 R18 R19 R22 R23 R28 R34 R35 R36 R51 R62 R64 R67 R73: library part R0402_10k_1%_0.0625W_100PPM, "Resistor - 1%", Case=0402, Manufacturer=GENERIC, Manufacturer1 ComponentHeight=0.4mm, Manufacturer1 Example="YAGEO PHYCOMP", Manufacturer1 Part Number=232270671003L, Manufacturer Part Number=R0402_10K_1%_0.0625W_100PPM, Power=0.0625W, Tolerance=±1%, Author="CERN DEM JLC", Component Type=Standard, CreateDate=03.12.2007, HelpURL=\\cern.ch\dfs\Applications\Altium\Datasheets\R0402_Phycomp_RC0402.pdf, LatestRevisionDate=17.10.2012, Mounted=Yes, Part Description="General Purpose Thick Film Chip Resistor", Part Number=R0402_10K_1%_0.0625W_100PPM, Pin Count=2, PressFit=No, Sense=No, SMD=Yes, Socket=No, Status="Not Recommended", TC=±100ppm/°C
R8 R47 R65 R69: library part R0603_0R_JUMPER, "Resistor", Case=0603, Manufacturer=GENERIC, Manufacturer1 ComponentHeight=0.55mm, Manufacturer1 Example="NIC COMPONENT", Manufacturer1 Part Number=NRC06Z0, Author="CERN DEM JLC", Component Type=Standard, CreateDate=03.12.2007, HelpURL=\\cern.ch\dfs\Applications\Altium\Datasheets\R0603_NIC_NRC.pdf, LatestRevisionDate=13.03.2008, Manufacturer Part Number=R0603_0R_JUMPER, Mounted=Yes, Part Description="1A (0.05R Max DC Resistance) Zero Ohm Jumper", Part Number=R0603_0R_JUMPER, Pin Count=2, PressFit=No, Sense=No, SMD=Yes, Socket=No, Status=Preferred
R10 R11: library part R0603_71R5_1%_0.1W_100PPM, "Resistor - 1%", Case=0603, Manufacturer=GENERIC, Manufacturer1 ComponentHeight=0.50mm, Manufacturer1 Example=VISHAY, Manufacturer1 Part Number=CRCW060371R5FKEA, Power=0.1W, Tolerance=±1%, Author="CERN DEM JLC", Component Type=Standard, CreateDate=11.12.2013, HelpURL="\\cern.ch\dfs\Applications\Altium\Datasheets\R0603_VISHAY_CRCW e3.pdf", LatestRevisionDate=11.12.2013, Manufacturer Part Number=R0603_71R5_1%_0.1W_100PPM, Mounted=Yes, Part Description="General Purpose Thick Film Chip Resistor", Part Number=R0603_71R5_1%_0.1W_100PPM, Pin Count=2, PressFit=No, Sense=No, SMD=Yes, Socket=No, Status=Preferred, TC=±100ppm/°C
R13 R16: library part R0603_46R4_0.1%_0.063W_10PPM, "Resistor - 0.1%", Case=0603, Manufacturer=GENERIC, Manufacturer1 ComponentHeight=0.5mm, Manufacturer1 Example="TYCO HOLSWORTHY", Manufacturer1 Part Number=RN73C1J46R4BTDF, Power=0.063W, Tolerance=±0.1%, Author="CERN DEM JLC", Component Type=Standard, CreateDate=03.12.2007, HelpURL=\\cern.ch\dfs\Applications\Altium\Datasheets\R0603_Tyco_RN73.pdf, LatestRevisionDate=13.03.2008, Manufacturer Part Number=R0603_46R4_0.1%_0.063W_10PPM, Mounted=Yes, Part Description="Thin Film Chip Resistor", Part Number=R0603_46R4_0.1%_0.063W_10PPM, Pin Count=2, PressFit=No, Sense=No, SMD=Yes, Socket=No, Status="Not Recommended", TC=±10ppm
R14 R15: library part R0603_96R5_0.5%_0.1W_50PPM, "Resistor - 0.5%", Case=0603, Manufacturer=GENERIC, Manufacturer1 ComponentHeight=0.55mm, Manufacturer1 Example=Yaego, Manufacturer1 Part Number=RT0603DRE0796R5L, Power=0.1W, Tolerance=±0.5%, Author=GK, Component Type=Standard, CreateDate=03.12.2007, HelpURL=\\cern.ch\dfs\Applications\Altium\Datasheets\R0603_NIC_NRC.pdf, LatestRevisionDate=13.03.2008, Manufacturer Part Number=R0603_96R5_0.5%_0.1W_50PPM, Mounted=Yes, Part Description="General Purpose Thick Film Chip Resistor", Part Number=R0603_96R5_0.5%_0.1W_50PPM, Pin Count=2, PressFit=No, Sense=No, SMD=Yes, Socket=No, Status=Preferred, TC=±50ppm/°C
R17 R41 R43 R44 R52 R53 R54 R56 R70: library part R0603_100R_1%_0.1W_100PPM, "Resistor - 1%", Case=0603, Manufacturer=GENERIC, Manufacturer1 ComponentHeight=0.55mm, Manufacturer1 Example="NIC COMPONENT", Manufacturer1 Part Number=NRC06F4700TRF, Power=0.1W, Tolerance=±1%, Author="CERN DEM JLC", Component Type=Standard, CreateDate=03.12.2007, HelpURL=\\cern.ch\dfs\Applications\Altium\Datasheets\R0603_NIC_NRC.pdf, LatestRevisionDate=13.03.2008, Manufacturer Part Number=R0603_100R_1%_0.1W_100PPM, Mounted=Yes, Part Description="General Purpose Thick Film Chip Resistor", Part Number=R0603_100R_1%_0.1W_100PPM, Pin Count=2, PressFit=No, Sense=No, SMD=Yes, Socket=No, Status=Preferred, TC=±100ppm/°C
R26 R27: library part R0402_3R9_1%_0.0625W_200PPM, "Resistor - 1%", Case=0402, Manufacturer=GENERIC, Manufacturer1 ComponentHeight=0.4mm, Manufacturer1 Example="YAGEO PHYCOMP", Manufacturer1 Part Number=232270673908L, Power=0.0625W, Tolerance=±1%, Author="CERN DEM JLC", Component Type=Standard, CreateDate=03.12.2007, HelpURL=\\cern.ch\dfs\Applications\Altium\Datasheets\R0402_Phycomp_RC0402.pdf, LatestRevisionDate=17.10.2012, Manufacturer Part Number=R0402_3R9_1%_0.0625W_200PPM, Mounted=Yes, Part Description="General Purpose Thick Film Chip Resistor", Part Number=R0402_3R9_1%_0.0625W_200PPM, Pin Count=2, PressFit=No, Sense=No, SMD=Yes, Socket=No, Status="Not Recommended", TC=±200ppm/°C
R31 R32 R68: library part R0603_20K_1%_0.1W_100PPM, "Resistor - 1%", Case=0603, Manufacturer=GENERIC, Manufacturer1 ComponentHeight=0.55mm, Manufacturer1 Example="NIC COMPONENT", Manufacturer1 Part Number=NRC06F2002TRF, Power=0.1W, Tolerance=±1%, Author="CERN DEM JLC", Component Type=Standard, CreateDate=03.12.2007, HelpURL=\\cern.ch\dfs\Applications\Altium\Datasheets\R0603_NIC_NRC.pdf, LatestRevisionDate=13.03.2008, Manufacturer Part Number=R0603_20K_1%_0.1W_100PPM, Mounted=Yes, Part Description="General Purpose Thick Film Chip Resistor", Part Number=R0603_20K_1%_0.1W_100PPM, Pin Count=2, PressFit=No, Sense=No, SMD=Yes, Socket=No, Status=Preferred, TC=±100ppm/°C
R33: library part R0603_39R_1%_0.1W_100PPM, "Resistor - 1%", Case=0603, Manufacturer=GENERIC, Manufacturer1 ComponentHeight=0.55mm, Manufacturer1 Example="NIC COMPONENT", Manufacturer1 Part Number=NRC06F39R0TRF, Power=0.1W, Tolerance=±1%, Author="CERN DEM JLC", Component Type=Standard, CreateDate=03.12.2007, HelpURL=\\cern.ch\dfs\Applications\Altium\Datasheets\R0603_NIC_NRC.pdf, LatestRevisionDate=13.03.2008, Manufacturer Part Number=R0603_39R_1%_0.1W_100PPM, Mounted=Yes, Part Description="General Purpose Thick Film Chip Resistor", Part Number=R0603_39R_1%_0.1W_100PPM, Pin Count=2, PressFit=No, Sense=No, SMD=Yes, Socket=No, Status=Preferred, TC=±100ppm/°C
R55: library part R0603_1K_1%_0.1W_100PPM, "Resistor - 1%", Case=0603, Manufacturer=GENERIC, Manufacturer1 ComponentHeight=0.55mm, Manufacturer1 Example="NIC COMPONENT", Manufacturer1 Part Number=NRC06F1001TRF, Power=0.1W, Tolerance=±1%, Author="CERN DEM JLC", Component Type=Standard, CreateDate=03.12.2007, HelpURL=\\cern.ch\dfs\Applications\Altium\Datasheets\R0603_NIC_NRC.pdf, LatestRevisionDate=13.03.2008, Manufacturer Part Number=R0603_1K_1%_0.1W_100PPM, Mounted=Yes, Part Description="General Purpose Thick Film Chip Resistor", Part Number=R0603_1K_1%_0.1W_100PPM, Pin Count=2, PressFit=No, Sense=No, SMD=Yes, Socket=No, Status=Preferred, TC=±100ppm/°C
R58 R59: library part R0603_169R_0.1%_0.063W_10PPM, "Resistor - 0.1%", Case=0603, Manufacturer=GENERIC, Manufacturer1 ComponentHeight=0.5mm, Manufacturer1 Example="TYCO HOLSWORTHY", Manufacturer1 Part Number=RN73C1J169RBTDF, Power=0.063W, Tolerance=±0.1%, Author="CERN DEM JLC", Component Type=Standard, CreateDate=03.12.2007, HelpURL=\\cern.ch\dfs\Applications\Altium\Datasheets\R0603_Tyco_RN73.pdf, LatestRevisionDate=13.03.2008, Manufacturer Part Number=R0603_169R_0.1%_0.063W_10PPM, Mounted=Yes, Part Description="Thin Film Chip Resistor", Part Number=R0603_169R_0.1%_0.063W_10PPM, Pin Count=2, PressFit=No, Sense=No, SMD=Yes, Socket=No, Status="Not Recommended", TC=±10ppm
SCREW1 SCREW2 SCREW3 SCREW4 SCREW6 SCREW9 SCREW10 SCREW11: library part BOSSARD_BN5687-3061605_v, "Screw", Manufacturer=BOSSARD, Manufacturer Part Number="BN5687 Art.3061605", Author="CERN DEM JLC", Component Type=Mechanical, ComponentHeight=2.4mm, CreateDate=15/01/2013, HelpURL=\\cern.ch\dfs\Applications\Altium\Datasheets\BOSSARD_BN5687-3061605.pdf, LatestRevisionDate=15/01/2013, Mounted=Yes, PackageDescription="M3 L=6mm Hexalobular Socket Pan Head Screw, Fully Threaded - Stainless Steel A2", Part Description="M3 L=6mm Hexalobular Socket Pan Head Screw, Fully Threaded, Stainless Steel A2", Part Number=BOSSARD_BN5687-3061605_v, Pin Count=0, PressFit=No, Sense=No, SMD=No, Socket=No, Status=None
SCREW5 SCREW8: library part Screw_M3x12_Countersunk_v, "M3 L=12mm Hexalobular Countersunk Head Screw, Fully Threaded, Stainless Steel A2", Manufacturer=BOSSARD, Manufacturer Part Number="B3X12/BN4851 Art.1148508", Part Number=BOSSARD_B3X12/BN4851, Author=GK, Component Type=Mechanical, ComponentHeight=14.4mm, CreateDate=22.08.2013, HelpURL=\\cern.ch\dfs\Applications\Altium\Datasheets\BOSSARD_BN5687-3061609.pdf, LatestRevisionDate=22.08.2013, Mounted=Yes, PackageDescription="M3 L=12mm Hexalobular Countersunk Head Screw, Fully Threaded, Stainless Steel A2", Part Description="M3 L=12mm Hexalobular Countersunk Head Screw, Fully Threaded, Stainless Steel A2", Pin Count=0, PressFit=No, Sense=No, SMD=No, Socket=No, Status=None
SCREW7 SCREW12: library part BOSSARD_BN5687-3061603_v, "Screw", Manufacturer=BOSSARD, Manufacturer Part Number="BN5687 Art.3061603", Author="CERN DEM JLC", Component Type=Mechanical, ComponentHeight=18.1mm, CreateDate=17.04.2014, HelpURL=\\cern.ch\dfs\Applications\Altium\Datasheets\BOSSARD_BN5687-3061603.pdf, LatestRevisionDate=17.04.2014, Mounted=Yes, PackageDescription="M2.5 L=16mm Hexalobular Socket Pan Head Screw, Fully Threaded - Stainless Steel A2", Part Description="M2.5 L=16mm Hexalobular Socket Pan Head Screw, Fully Threaded, Stainless Steel A2", Part Number=BOSSARD_BN5687-3061603_v, Pin Count=0, PressFit=No, Sense=No, SMD=No, Socket=No, Status=None